# Altium PCB PCB1.PcbDoc
Units mil, origin at the board's own origin, x right, y up, seen from the top; angles counter-clockwise.
Board outline 3510 x 2120 mil, 2 copper layers (Top Layer, Bottom Layer); 8 components, 35 nets, 92 pads, 12 vias.
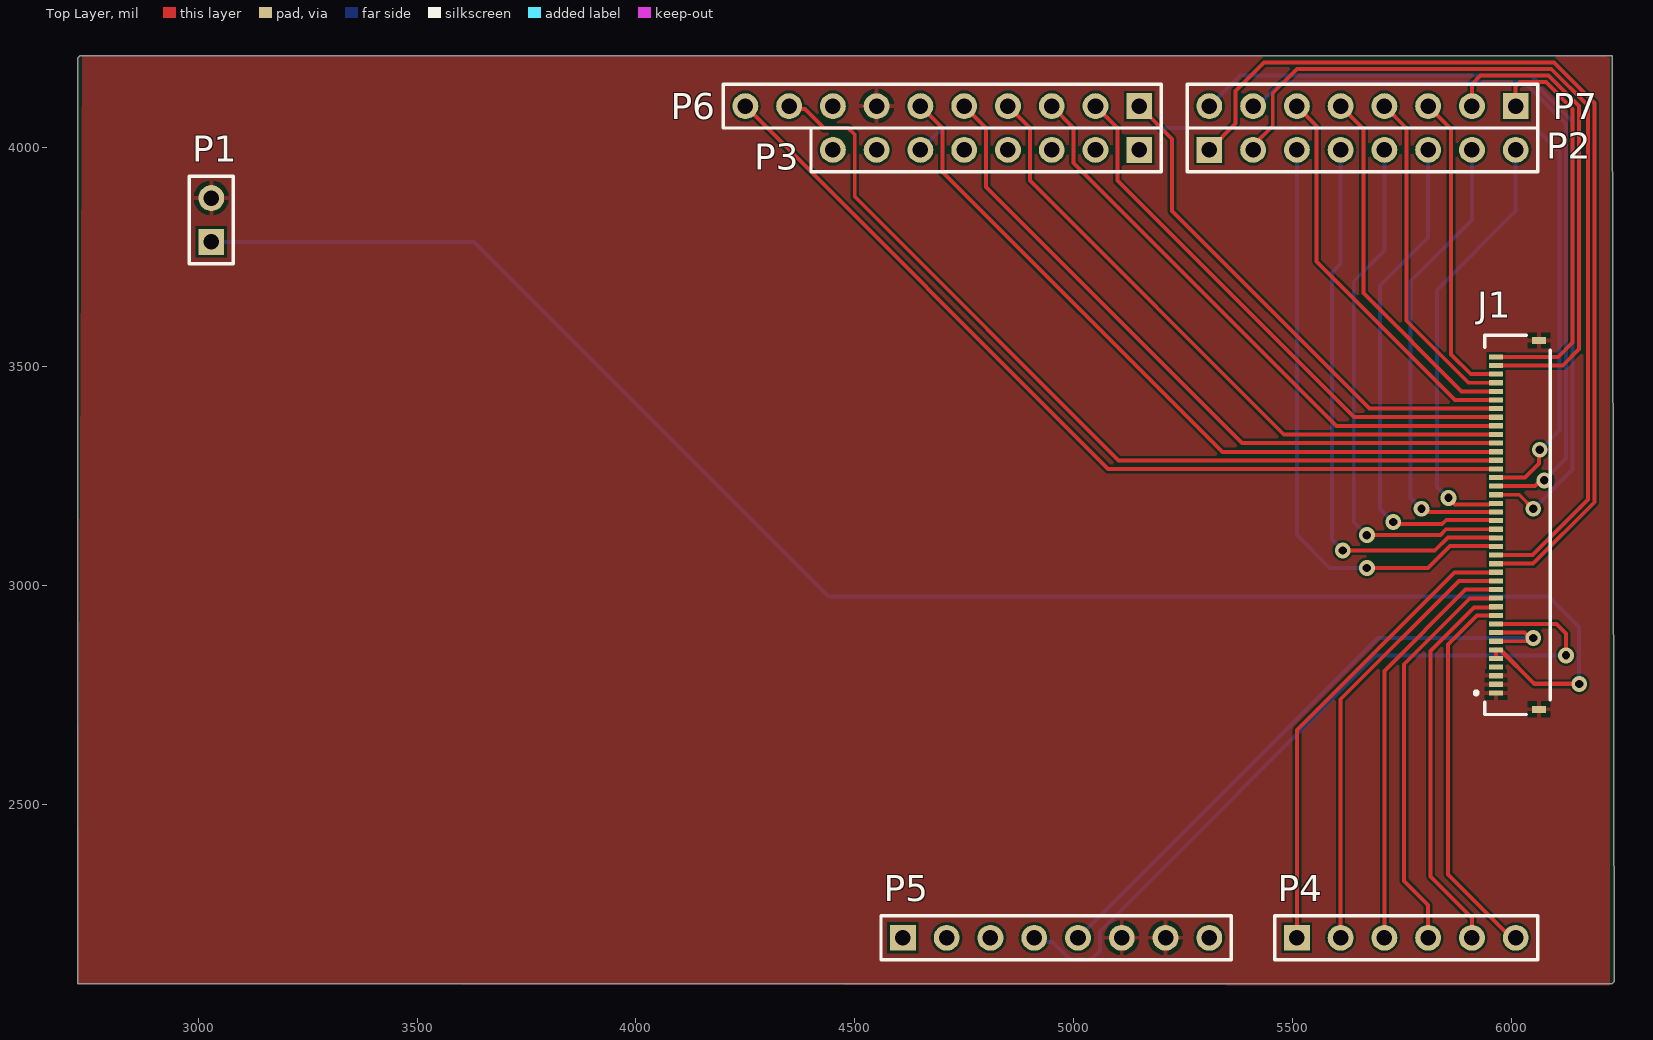
[diagram p0: Top Layer view]
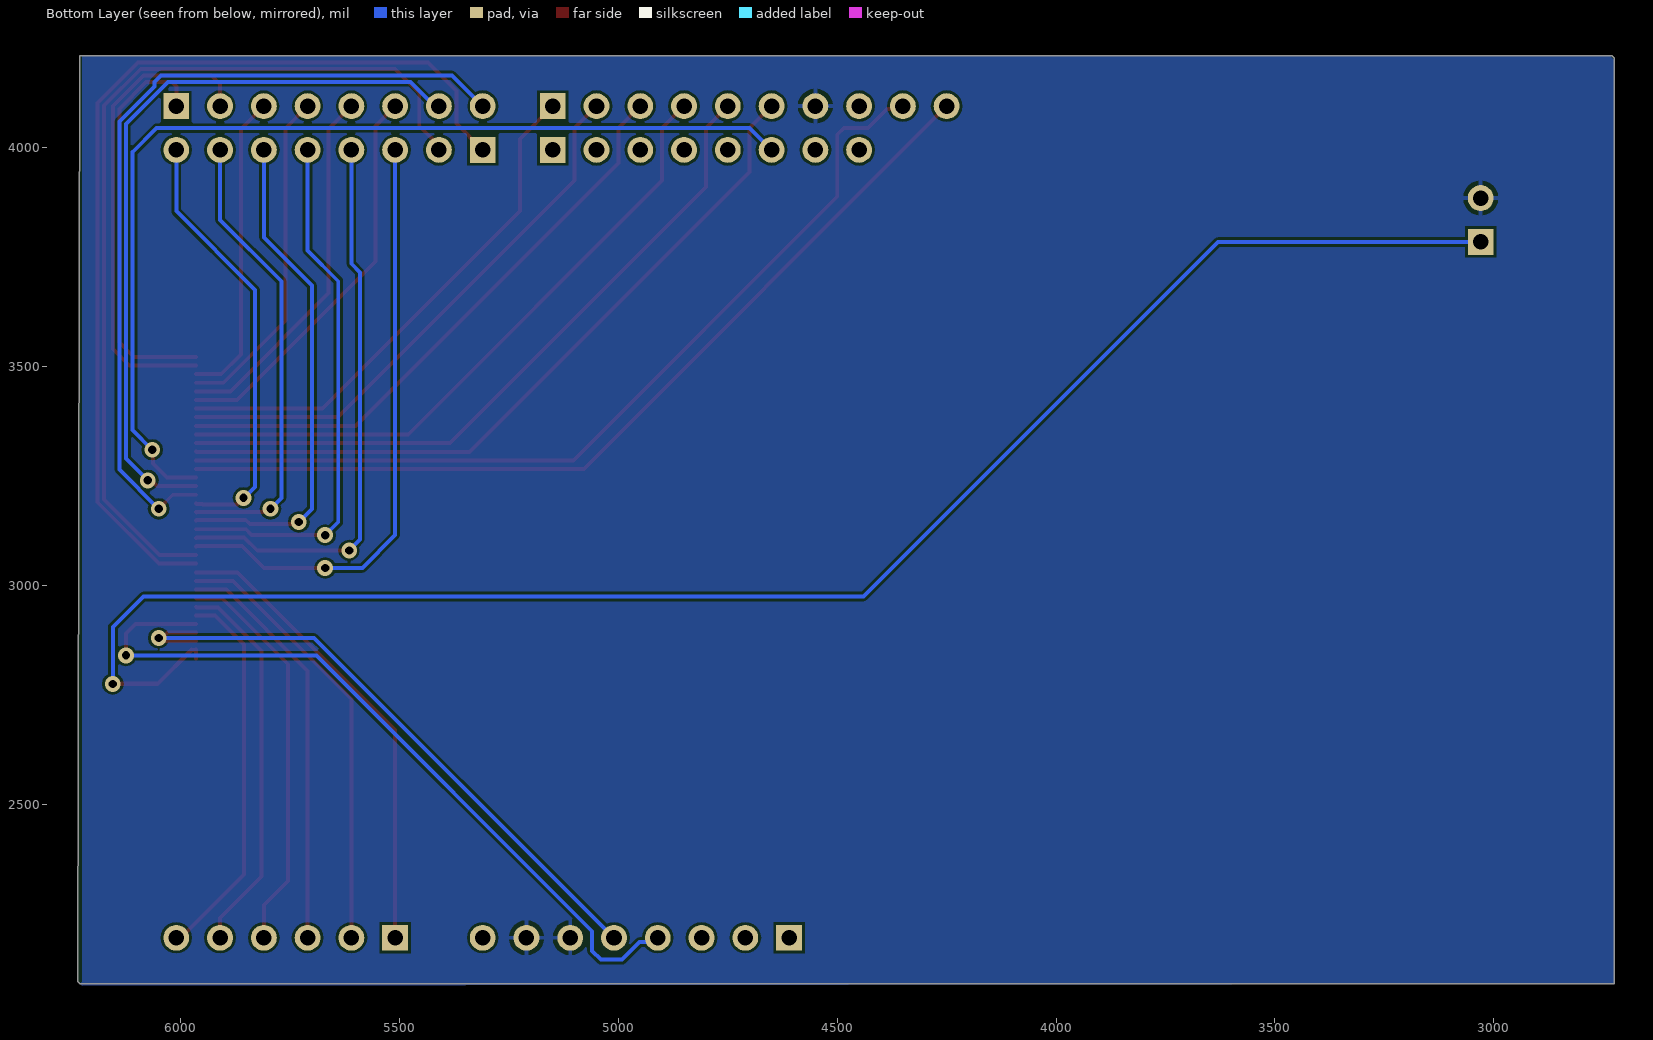
[diagram p1: Bottom Layer view, seen from below]

## Layer stack, top to bottom
Top Solder: solder mask 0.4, Solder Resist, Dk 3.5
Top Layer: signal copper 1.4
Dielectric 1: dielectric 12.6, FR-4, Dk 4.8
Bottom Layer: signal copper 1.4
Bottom Solder: solder mask 0.4, Solder Resist, Dk 3.5

## Board outline
6235,2095 6230,2090 2725,2090 2725,4205 2730,4210 6230,4210

## Design rules (kind name [scope] priority, off if disabled: settings)
Clearance [All] p1: gap=6 ignorepadtopadclearanceinfootprint=FALSE except(0: Arc-Hole Track-Hole SMDPad-Hole THPad-Hole Via-Hole Fill-Hole Poly-Hole Region-Hole Text-Hole)
MinimumSolderMaskSliver [All] p1: minsoldermaskwidth=3.8
PolygonConnect [All] p1: connectstyle=Relief reliefconductorwidth=10 reliefentries=4 polygonreliefangle="90 Angle" airgapwidth=10
RoomDefinition Sheet1 [InComponentClass('Sheet1')] p1: confinementstyle=ConfineIn formatcopy=TRUE lockcomponents=FALSE outline 7910,3270 11520,3270 11520,5415 7910,5415
RoutingVias [All] p1: holewidth=19 width=36 viastyle="Through Hole" minholewidth=15 minwidth=20 maxholewidth=28 maxwidth=50
SilkToSolderMaskClearance [IsPad] p1: minsilkscreentomaskgap=3 clearancetoexposedcopper=TRUE
SolderMaskExpansion [All] p1: expansion=4 istentingtop=FALSE
Width [All] p1: maxlimit=10 minlimit=6 preferedwidth=9 minimp=50.000000 maximp=50.000000 favimp=50.000000
28 further rules are at their usual default settings.

## Components (designator, comment, footprint, x,y, rotation, side; value= is the part's Value field where it differs from the comment)
J1 "FFC2B28-40-G" GCT_FFC2B28-40-G 6014.21,3138.27 r90 top
P1 "Header 2" HDR1X2 3030,3785 r90 top
P2 "Header 8" HDR1X8 5310,3995 r0 top
P3 "Header 8" HDR1X8 5150,3995 r180 top
P4 "Header 6" HDR1X6 5510,2195 r0 top
P5 "Header 8" HDR1X8 4610,2195 r0 top
P6 "Header 10" HDR1X10 5150,4095 r180 top
P7 "Header 8" HDR1X8 6010,4095 r180 top

## Footprints (in the part's own frame and the unit in brackets; to place one, negate y for a bottom-side part, rotate by r counter-clockwise, add the part's x,y. Pads: shape width x height; smd on the part's side, far side on the other; paste and mask are expansions set on the pad)
GCT_FFC2B28-40-G [mm]
  rect 0.3x0.8 smd: 1(-9.75,1.25) 2(-9.25,1.25) 3(-8.75,1.25) 4(-8.25,1.25) 5(-7.75,1.25) 6(-7.25,1.25) 7(-6.75,1.25) 8(-6.25,1.25) 9(-5.75,1.25) 10(-5.25,1.25) 11(-4.75,1.25) 12(-4.25,1.25) 13(-3.75,1.25) 14(-3.25,1.25) 15(-2.75,1.25) 16(-2.25,1.25) 17(-1.75,1.25) 18(-1.25,1.25) 19(-0.75,1.25) 20(-0.25,1.25) 21(0.25,1.25) 22(0.75,1.25) 23(1.25,1.25) 24(1.75,1.25) 25(2.25,1.25) 26(2.75,1.25) 27(3.25,1.25) 28(3.75,1.25) 29(4.25,1.25) 30(4.75,1.25) 31(5.25,1.25) 32(5.75,1.25) 33(6.25,1.25) 34(6.75,1.25) 35(7.25,1.25) 36(7.75,1.25) 37(8.25,1.25) 38(8.75,1.25) 39(9.25,1.25) 40(9.75,1.25)
  rect 0.4x0.8 smd: S1(-10.7,-1.25) S2(10.7,-1.25)
  silkscreen extent -11,-1.9 11,2.5
HDR1X2 [mm] "Connector; Header; 2 Position"
  rect 1.5x1.5 hole 0.9: 1(0,0)
  round 1.5 hole 0.9: 2(2.54,0)
  silkscreen extent -1.27,-1.27 3.81,1.27
HDR1X6 [mm] "Connector; Header; 6 Position"
  rect 1.5x1.5 hole 0.9: 1(0,0)
  round 1.5 hole 0.9: 2(2.54,0) 3(5.08,0) 4(7.62,0) 5(10.16,0) 6(12.7,0)
  silkscreen extent -1.27,-1.27 13.97,1.27
HDR1X8 [mm] "Connector; Header; 8 Position"
  rect 1.5x1.5 hole 0.9: 1(0,0)
  round 1.5 hole 0.9: 2(2.54,0) 3(5.08,0) 4(7.62,0) 5(10.16,0) 6(12.7,0) 7(15.24,0) 8(17.78,0)
  silkscreen extent -1.27,-1.27 19.05,1.27
HDR1X10 [mm] "Connector; Header; 10 Position"
  rect 1.5x1.5 hole 0.9: 1(0,0)
  round 1.5 hole 0.9: 2(2.54,0) 3(5.08,0) 4(7.62,0) 5(10.16,0) 6(12.7,0) 7(15.24,0) 8(17.78,0) 9(20.32,0) 10(22.86,0)
  silkscreen extent -1.27,-1.27 24.13,1.27

## Part data
J1: "40 Position FFC, FPC Connector Contacts, Top and Bottom 0.020 _0.50mm_ Surface Mount, Right Angle", Package="Package Analog Devices", Availability=Unavailable, MF="Global Connector Technology", MP=FFC2B28-40-G, Price=None, SnapEDA_Link=https://www.snapeda.com/parts/FFC2B28-40-G/Global%20Connector%20Technology/view-part/4223068/?ref=snap
P1: "Header, 2-Pin", LatestRevisionDate=17-Jul-2002, LatestRevisionNote="Re-released for DXP Platform.", Publisher="Altium Limited"
P2 P3 P5 P7: "Header, 8-Pin", LatestRevisionDate=17-Jul-2002, LatestRevisionNote="Re-released for DXP Platform.", Publisher="Altium Limited"
P4: "Header, 6-Pin", LatestRevisionDate=17-Jul-2002, LatestRevisionNote="Re-released for DXP Platform.", Publisher="Altium Limited"
P6: "Header, 10-Pin", LatestRevisionDate=17-Jul-2002, LatestRevisionNote="Re-released for DXP Platform.", Publisher="Altium Limited"

## Via types
v1: diameter 36, hole 19, Top Layer to Bottom Layer, 12 vias

## Nets (pads, with @x,y where several pads share a name; then routed paths per layer and width w, separated by ;. In a path a pad name is that pad's centre, name@x,y a point inside that pad or via, vN(x,y) a via of type N, cw(c..) or ccw(c..) an arc to the next point about the centre after c; other vN are vias at no path point)
GND: J1.1 J1.2 J1.3 J1.S1 J1.S2 P1.2 P5.6 P5.7 P6.7
NetJ1_5: J1.5 J1.6 P1.1 | length 3915.6
  Top Layer w9: J1.6 J1.6@5974.84,2852.83
  Top Layer w10: J1.5 J1.6 ; J1.6@5974.84,2852.83 6052.68,2775 v1(6155,2775)
  Bottom Layer w9: P1.1@3015,3760 3055,3760 P1.1@3045,3770 ; P1.1 3630,3785 4440,2975 6085,2975 6155,2905 v1(6155,2775)
NetJ1_7: J1.7 J1.8 P5.5 | length 1494.6
  Top Layer w9: J1.7 6035.21,2872.52 v1@6042.69,2880 ; J1.8 6030.49,2892.2 v1@6042.69,2880 ; v1(6050,2880) v1@6042.69,2880
  Bottom Layer w9: P5.5 5695,2880 v1(6050,2880)
NetJ1_9: J1.9 P5.4 | length 1768.9
  Top Layer w9: J1.9 6103.11,2911.89 6125,2890 v1(6125,2840.15)
  Bottom Layer w9: P5.4 4919.58,2185.42 4951.35,2185.42 4991.77,2145 5040,2145 5060,2165 5060,2210 5690.15,2840.15 v1(6125,2840.15)
NetJ1_10: J1.10 P4.6 | length 877.6
  Top Layer w9: J1.10 5921.57,2931.57 5855,2865 5855,2340 6000,2195 P4.6
NetJ1_11: J1.11 P4.5 | length 886.3
  Top Layer w9: P4.5 5910,2240 5815,2335 5815,2850 5915,2950 5963.74,2950 J1.11
NetJ1_12: J1.12 P4.4 | length 920.3
  Top Layer w9: P4.4 5810,2270 5755,2325 5755,2820 5905,2970 5964.06,2970 J1.12
NetJ1_13: J1.13 P4.3 | length 941.9
  Top Layer w9: P4.3 5710,2805 5895.63,2990.63 J1.13
NetJ1_14: J1.14 P4.2 | length 1012
  Top Layer w9: P4.2 5610,2740 5880.31,3010.31 J1.14
NetJ1_15: J1.15 P4.1 | length 1079.1
  Top Layer w9: P4.1 5510,2670 5870,3030 J1.15
NetJ1_16: J1.16 P2.1 | length 2240.7
  Top Layer w9: P2.1 5369.97,4054.97 5369.97,4129.97 5435,4195 6097.43,4195 6190,4102.43 6190,3190 6049.69,3049.69 J1.16
NetJ1_17: J1.17 P2.2 | length 2088.7
  Top Layer w9: P2.2 5410,4005 5455,4050 5455,4125 5510,4180 6091.21,4180 6175,4096.21 6175,3196.21 6048.16,3069.37 J1.17
NetJ1_18: J1.18 P2.3 | length 1387.2
  Top Layer w9: v1(5670,3040) 5810,3040 5860,3090 5964.06,3090 J1.18
  Bottom Layer w9: P2.3 5510,3115 5585,3040 v1(5670,3040)
NetJ1_19: J1.19 P2.4 | length 1296.6
  Top Layer w9: v1(5615,3080) 5825,3080 5855,3110 5963.74,3110 J1.19
  Bottom Layer w9: P2.4 5610,3735 5590,3715 5590,3105 v1(5615,3080)
NetJ1_20: J1.20 P2.5 | length 1222
  Top Layer w9: v1(5670,3115) 5837.72,3115 5851.15,3128.43 J1.20
  Bottom Layer w9: v1(5670,3115) 5640,3145 5640,3695 5710,3765 P2.5
NetJ1_21: J1.21 P2.6 | length 1150
  Top Layer w9: v1(5730,3145) 5735,3140 5841.51,3140 5851.51,3150 5948.48,3150 5948.96,3149.52 5963.59,3149.52 J1.21
  Bottom Layer w9: v1(5730,3145) 5700,3175 5700,3685 5810,3795 P2.6
NetJ1_22: J1.22 P2.7 | length 1063.2
  Top Layer w9: v1(5794.9,3175) 5802.21,3175 5809.41,3167.8 J1.22 J1.22@5963.7,3166.5
  Bottom Layer w9: v1(5794.9,3175) 5770,3199.9 5770,3695 5910,3835 P2.7
NetJ1_23: J1.23 P2.8 | length 997.2
  Top Layer w9: v1(5856.25,3200) 5871.25,3185 5948.48,3185 5949.55,3186.07 5963.59,3186.07 J1.23
  Bottom Layer w9: v1(5856.25,3200) 5855,3200 5830,3225 5830,3675 6010,3855 P2.8
NetJ1_24: J1.24 P7.8 | length 1929.1
  Top Layer w9: J1.24 6018.14,3207.17 v1(6050.31,3175)
  Bottom Layer w9: P7.8 5380,4165 6045,4165 6060,4150 6060,4140.12 6140,4060.12 6140,3264.7 v1(6050.31,3175)
NetJ1_25: J1.25 P7.7 | length 1727.6
  Top Layer w9: J1.25 6054.54,3226.85 6067.69,3240 v1(6075,3240)
  Bottom Layer w9: P7.7 5420,4095 5475,4150 6028.9,4150 6125,4053.9 6125,3290 v1(6075,3240)
NetJ1_26: J1.26 P3.6 | length 2345.8
  Top Layer w9: J1.26 6031.54,3246.54 6063.5,3278.5 6063.5,3308.5 v1(6065,3310)
  Bottom Layer w9: P3.6 4700,4045 6054.73,4045 6110,3989.73 6110,3355 v1(6065,3310)
NetJ1_27: J1.27 P6.10 | length 2058.3
  Top Layer w9: P6.10 5078.78,3266.22 J1.27
NetJ1_28: J1.28 P6.9 | length 2033.1
  Top Layer w9: P6.9 4356.42,4088.58 4386.43,4088.58 4430,4045 4485,4045 4500,4030 4500,3888.39 5102.49,3285.91 J1.28
NetJ1_29: J1.29 P6.6 | length 1701.1
  Top Layer w9: P6.6 4700,4045 4700,3945 5340,3305 5964.41,3305 J1.29
NetJ1_30: J1.30 P6.5 | length 1612.9
  Top Layer w9: P6.5 4800,4045 4800,3910 5384.72,3325.28 J1.30
NetJ1_31: J1.31 P6.4 | length 1496
  Top Layer w9: P6.4 4900,4045 4900,3925 5480.04,3344.96 J1.31
NetJ1_32: J1.32 P6.3 | length 1364.4
  Top Layer w9: P6.3 4999.79,4045.21 4999.79,3965.21 5600.35,3364.65 J1.32
NetJ1_33: J1.33 P6.2 | length 1279.7
  Top Layer w9: P6.2 5099.79,4045.21 5099.79,3925.21 5640.67,3384.33 J1.33
NetJ1_34: J1.34 P6.1 | length 1197.9
  Top Layer w9: P6.1 5225,4020 5225,3855 5675.98,3404.02 J1.34
NetJ1_35: J1.35 P7.6 | length 914.7
  Top Layer w9: P7.6 5555,4050 5555,3740 5871.3,3423.7 J1.35
NetJ1_36: J1.36 P7.5 | length 844.6
  Top Layer w9: P7.5 5662.29,4042.71 5662.29,3667.71 5886.61,3443.39 J1.36
NetJ1_37: J1.37 P7.4 | length 774.5
  Top Layer w9: P7.4 5760,4045 5760,3605 5901.93,3463.07 J1.37
NetJ1_38: J1.38 P7.3 | length 710.3
  Top Layer w9: P7.3 5862.29,4042.71 5862.29,3527.71 5907.24,3482.76 J1.38
NetJ1_39: J1.39 P7.2 | length 1092.8
  Top Layer w9: P7.2 5910,4145 5930,4165 6085,4165 6155,4095 6155,3540 6117.44,3502.44 J1.39
NetJ1_40: J1.40 P7.1 | length 926.9
  Top Layer w9: J1.40 6107.13,3522.13 6140,3555 6140,4088.79 6078.79,4150 6020,4150 6010,4140 P7.1
pads on no net: J1.4 P3.1 P3.2 P3.3 P3.4 P3.5 P3.7 P3.8 P5.1 P5.2 P5.3 P5.8 P6.8

## Polygon pours and split planes (outlines as drawn)
GND on Bottom Layer "GND_L02_P000" (solid, pour order 0): 2724.98,4199.98 2735,4210 6225,4210 6225,2095 6230,2090 6225,2085 2725,2090
GND on Top Layer "GND_L01_P001" (solid, pour order 1): 2735,4210 6215,4210 6225,4205 6225,2085 2725,2090

## Silkscreen, mask and mechanical layers (free items; w line width, h text height)
Mechanical 1:
  the board outline again, w0
Mechanical 3:
  lines w10: 3515,2090 3515,4195 6045,4195 6110,4130 6110,3690 6210,3590 6210,2300 6110,2200 6110,2100 6100,2090 3515,2090 ; 4200,4045 5200,4045 5200,4145 4200,4145 4200,4045 ; 4560,2145 4560,2245 5360,2245 5360,2145 4560,2145 ; 5260,4045 6060,4045 6060,4145 5260,4145 5260,4045 ; 5460,2145 5460,2245 6060,2245 6060,2145 5460,2145